# EAGLE board MainLAN_ARM (EAGLE 6.4)
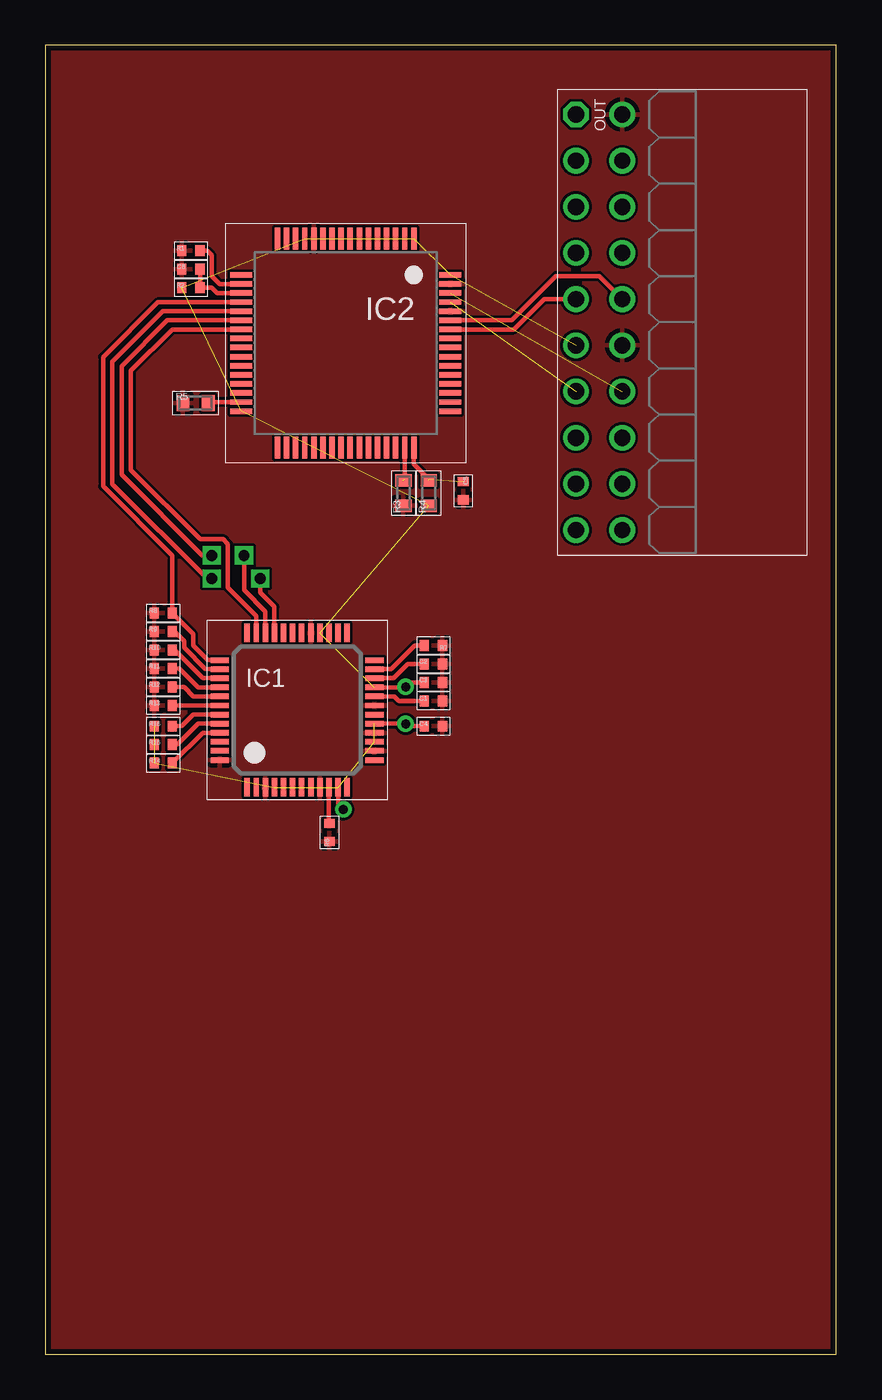
[diagram p0: board, top side]
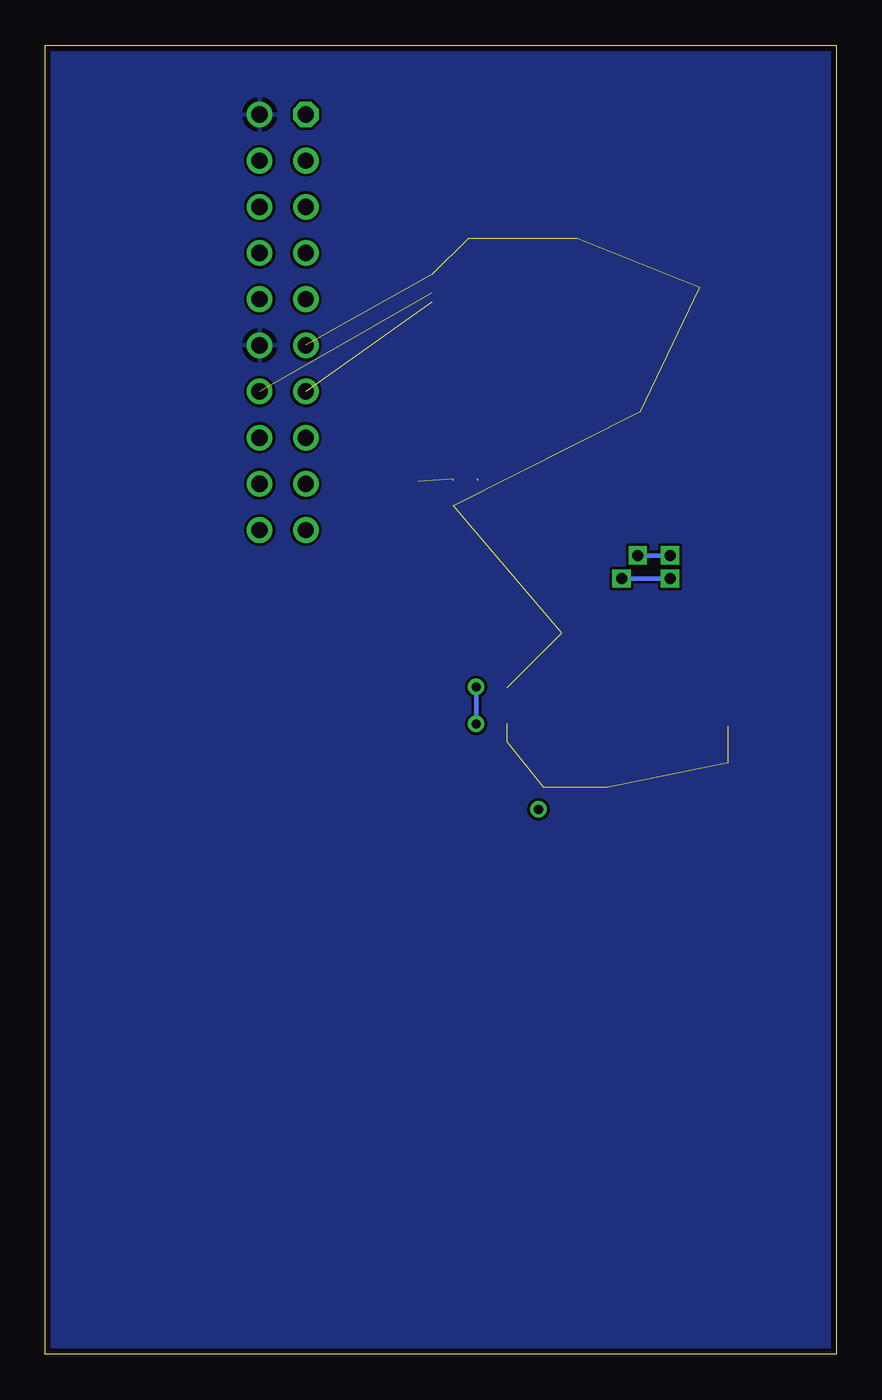
[diagram p1: board, bottom side, seen from below]

Size 43.5 x 72 mm. Coordinates in mm from the lower left corner, seen from the top.
Outline: 0,0 43.5,0 43.5,72 0,72 0,0
Copper layers (1*16): Top 0.035mm / dielectric 1.5mm / Bottom 0.035mm
Design rules "default *": minimum track width 10mil, minimum drill 10mil, track to track 6mil, track to pad 6mil, pad to pad 6mil, via to via 6mil, smd to smd 6mil, copper to edge 12mil, drill to drill 8mil, minimum pad ring 10mil, minimum via ring 8mil, stop-mask expansion 4mil, vias tented up to drill 0mil, thermal gap 10mil
tKeepout: area 0,0 to 43.5,2; area 0,70 to 43.5,72

## Footprints (pad centres in the part's own frame; a part is rotated, then mirrored left to right if it is on the bottom)
0402 = smd 0.5 x 0.6: 1 -0.5,0; 2 0.5,0
LQFP48 = smd 0.3 x 1: 1 -2.75,-4.25; 2 -2.25,-4.25; 3 -1.75,-4.25; 4 -1.25,-4.25; 5 -0.75,-4.25; 6 -0.25,-4.25; 7 0.25,-4.25; 8 0.75,-4.25; 9 1.25,-4.25; 10 1.75,-4.25; 11 2.25,-4.25; 12 2.75,-4.25; 25 2.75,4.25; 26 2.25,4.25; 27 1.75,4.25; 28 1.25,4.25; 29 0.75,4.25; 30 0.25,4.25; 31 -0.25,4.25; 32 -0.75,4.25; 33 -1.25,4.25; 34 -1.75,4.25; 35 -2.25,4.25; 36 -2.75,4.25 | smd 1 x 0.3: 13 4.25,-2.75; 14 4.25,-2.25; 15 4.25,-1.75; 16 4.25,-1.25; 17 4.25,-0.75; 18 4.25,-0.25; 19 4.25,0.25; 20 4.25,0.75; 21 4.25,1.25; 22 4.25,1.75; 23 4.25,2.25; 24 4.25,2.75; 37 -4.25,2.75; 38 -4.25,2.25; 39 -4.25,1.75; 40 -4.25,1.25; 41 -4.25,0.75; 42 -4.25,0.25; 43 -4.25,-0.25; 44 -4.25,-0.75; 45 -4.25,-1.25; 46 -4.25,-1.75; 47 -4.25,-2.25; 48 -4.25,-2.75
LQFP64 = smd 0.3 x 1.2: 1 -3.75,-5.75; 2 -3.25,-5.75; 3 -2.75,-5.75; 4 -2.25,-5.75; 5 -1.75,-5.75; 6 -1.25,-5.75; 7 -0.75,-5.75; 8 -0.25,-5.75; 9 0.25,-5.75; 10 0.75,-5.75; 11 1.25,-5.75; 12 1.75,-5.75; 13 2.25,-5.75; 14 2.75,-5.75; 15 3.25,-5.75; 16 3.75,-5.75; 33 3.75,5.75; 34 3.25,5.75; 35 2.75,5.75; 36 2.25,5.75; 37 1.75,5.75; 38 1.25,5.75; 39 0.75,5.75; 40 0.25,5.75; 41 -0.25,5.75; 42 -0.75,5.75; 43 -1.25,5.75; 44 -1.75,5.75; 45 -2.25,5.75; 46 -2.75,5.75; 47 -3.25,5.75; 48 -3.75,5.75 | smd 1.2 x 0.3: 17 5.75,-3.75; 18 5.75,-3.25; 19 5.75,-2.75; 20 5.75,-2.25; 21 5.75,-1.75; 22 5.75,-1.25; 23 5.75,-0.75; 24 5.75,-0.25; 25 5.75,0.25; 26 5.75,0.75; 27 5.75,1.25; 28 5.75,1.75; 29 5.75,2.25; 30 5.75,2.75; 31 5.75,3.25; 32 5.75,3.75; 49 -5.75,3.75; 50 -5.75,3.25; 51 -5.75,2.75; 52 -5.75,2.25; 53 -5.75,1.75; 54 -5.75,1.25; 55 -5.75,0.75; 56 -5.75,0.25; 57 -5.75,-0.25; 58 -5.75,-0.75; 59 -5.75,-1.25; 60 -5.75,-1.75; 61 -5.75,-2.25; 62 -5.75,-2.75; 63 -5.75,-3.25; 64 -5.75,-3.75
ML20LS = drill 0.9 octagon: P$1 -11.43,-1.27 | drill 0.9: P$2 -11.43,1.27; P$3 -8.89,-1.27; P$4 -8.89,1.27; P$5 -6.35,-1.27; P$6 -6.35,1.27; P$7 -3.81,-1.27; P$8 -3.81,1.27; P$9 -1.27,-1.27; P$10 -1.27,1.27; P$11 1.27,-1.27; P$12 1.27,1.27; P$13 3.81,-1.27; P$14 3.81,1.27; P$15 6.35,-1.27; P$16 6.35,1.27; P$17 8.89,-1.27; P$18 8.89,1.27; P$19 11.43,-1.27; P$20 11.43,1.27
0603 = smd 0.7 x 0.9: 1 -0.697,0; 2 0.697,0

## Placement (x,y rotation side)
C1  4u7  [0402]  21.34,35.94 0 top
C2  10n  [0402]  21.34,37.97 0 top
C3  100n  [0402]  21.34,36.96 0 top
C4  100n  [0402]  21.34,34.54 0 top
C5  [0402]  22.99,47.5 270 top
C6  [0402]  8,59.69 0 top
IC1  W5500  [LQFP48]  13.84,35.43 0 top
IC2  [LQFP64]  16.51,55.63 180 top
OUT  MF20  [ML20LS]  30.45,56.77 270 top
R1  [0402]  8,60.71 0 top
R2  [0402]  8,58.67 0 top
R3  [0603]  19.68,47.37 90 top
R4  [0603]  21.08,47.37 90 top
R5  [0603]  8.26,52.32 0 top
R6  12k4  [0402]  15.62,28.7 90 top
R7  10k  [0402]  21.34,38.99 180 top
R8  10k  [0402]  6.48,40.77 0 top
R9  10k  [0402]  6.48,39.75 0 top
R10  10k  [0402]  6.48,38.73 0 top
R11  10k  [0402]  6.48,37.72 0 top
R12  10k  [0402]  6.48,36.7 0 top
R13  10k  [0402]  6.48,35.69 0 top
R14  10k  [0402]  6.48,32.51 0 top
R15  10k  [0402]  6.48,33.53 0 top
R16  10k  [0402]  6.48,34.54 0 top

## Library data of the parts
C1-C6 R1-R16 = RCL
IC1 = ICs
IC2 = STM32
OUT = Conn

## Nets
+3V3: C3.1 C4.1 IC1.4 IC1.8 IC1.11 IC1.15 IC1.17 IC1.21 IC1.28 IC2.1 IC2.13 IC2.32 IC2.64 OUT.P$11 R2.1 R4.1 R14.1 R15.1 R16.1
AI6: OUT.P$20
AI7: OUT.P$19
GND: C1.2 C2.2 C3.2 C4.2 C5.2 C6.1 IC1.3 IC1.9 IC1.14 IC1.16 IC1.19 IC1.29 IC1.48 IC2.12 IC2.60 IC2.63 OUT.P$2 OUT.P$12 R1.1 R3.1 R5.1 R6.1 R7.1 R8.1 R9.1 R10.1 R11.1 R12.1 R13.1
INT_L: IC1.36
MISO: IC1.34 IC2.22
MOSI: IC1.35 IC2.23
N$1: IC2.18 R1.2
N$2: C6.2 IC2.19 R2.2
N$3: IC2.47 R3.2
N$4: C5.1 IC2.48 R4.2
N$5: IC2.31 R5.2
N$6: IC1.10 R6.2
N$7: C1.1 IC1.20
N$8: IC1.45 R14.2
N$9: C2.1 IC1.22
N$10: IC1.23 R7.2
N$11: IC1.42 R13.2
N$12: IC1.41 R12.2
N$13: IC1.40 R11.2
N$14: IC1.39 R10.2
N$15: IC1.38 R9.2
N$16: IC1.44 R15.2
N$17: IC1.43 R16.2
NSS_L: IC1.32
PD2: OUT.P$8
PD3: OUT.P$7
PD4: OUT.P$6
PD5: OUT.P$5
PD6: OUT.P$4
PD7: OUT.P$3
RST_L: IC1.37 IC2.20 R8.2
RXD: IC2.59 OUT.P$10
RXN: IC1.5
RXP: IC1.6
SCK: IC1.33 IC2.21
SCL: IC2.61 OUT.P$13
SDA: IC2.62 OUT.P$14
TXD: IC2.58 OUT.P$9
TXN: IC1.1
TXP: IC1.2
VIN: OUT.P$1

## Tracks (layer width: path | path; a pad name or v marks a point on that pad's centre or on a via)
+3V3  (via drill 0.5)  (15 unrouted)
  Top 0.254: IC1.21 19.79,36.68 v19.81,36.7 20.07,36.96 C3.1 | IC1.11 16.09,30.26 v16.38,29.97 | IC1.17 19.8,34.68 v19.81,34.67 19.94,34.54 C4.1
  Bottom 0.254: v19.81,36.7 v19.81,34.67
GND
  pour Bottom: 0,0 43.5,0 43.5,72 0,72
  pour Top: 0,0 43.5,0 43.5,72 0,72
MISO  (via drill 0.6)
  Top 0.254: IC2.22 6.71,56.88 4.19,54.36 4.19,48.39 8.64,43.94 v9.14,43.94 | IC1.34 12.09,40.87 10.92,42.04 v10.92,43.94
  Bottom 0.254: v9.14,43.94 v10.92,43.94
MOSI
  Top 0.254: IC2.23 6.97,56.38 4.7,54.1 4.7,48.64 8.51,44.83 9.78,44.83 10.03,44.58 10.03,42.16 11.59,40.6 IC1.35
N$1
  Top 0.254: IC2.18 9.58,58.88 9.14,59.31 9.14,60.45 8.89,60.71 R1.2
N$2
  Top 0.254: C6.2 R2.2 9.14,58.67 9.44,58.38 IC2.19
N$3  (1 unrouted)
  Top 0.254: IC2.47 19.76,48.14
N$4  (2 unrouted)
  Top 0.254: IC2.48 20.26,48.95 21.08,48.13
N$5
  Top 0.254: 8.93,52.38 R5.2 9,52.38 IC2.31
N$6
  Top 0.254: IC1.10 15.59,29.23 R6.2
N$7
  Top 0.254: IC1.20 19.19,36.18 19.43,35.94 C1.1
N$8
  Top 0.254: IC1.45 8.65,34.18 R14.2
N$9
  Top 0.254: IC1.22 19.15,37.18 19.94,37.97 C2.1
N$10
  Top 0.254: IC1.23 19.01,37.68 20.32,38.99 R7.2
N$11
  Top 0.254: IC1.42 R13.2
N$12
  Top 0.254: IC1.41 8.14,36.18 7.62,36.7 R12.2
N$13
  Top 0.254: IC1.40 8.4,36.68 7.37,37.72 R11.2
N$14
  Top 0.254: IC1.39 8.66,37.18 7.1,38.73 R10.2
N$15
  Top 0.254: IC1.38 8.8,37.68 7.62,38.86 7.62,39.24 7.11,39.75 R9.2
N$16
  Top 0.254: IC1.44 8.39,34.68 7.24,33.53 R15.2
N$17
  Top 0.254: IC1.43 8.13,35.18 7.49,34.54 R16.2
RST_L
  Top 0.254: IC1.37 8.93,38.18 8.13,38.99 8.13,39.62 R8.2 6.99,43.94 3.17,47.75 3.17,54.86 6.19,57.88 IC2.20
RXD
  Top 0.254: IC2.59 25.63,56.88 28.07,59.31 30.45,59.31 OUT.P$10
SCK  (via drill 0.6)
  Top 0.254: IC2.21 6.45,57.38 3.68,54.61 3.68,47.88 8.89,42.67 v9.14,42.67 | IC1.33 12.59,41.13 11.81,41.91 v11.81,42.67
  Bottom 0.254: v9.14,42.67 v11.81,42.67
SCL  (1 unrouted)
SDA  (1 unrouted)
TXD
  Top 0.254: IC2.58 25.77,56.38 27.43,58.04 OUT.P$9